# Altium PCB oxi_dev2.PcbDoc
Units mil, origin at the board's own origin, x right, y up, seen from the top; angles counter-clockwise.
Board outline 6000 x 4000 mil, 2 copper layers (Top Layer, Bottom Layer); 84 components, 70 nets, 346 pads, 0 vias.
Unrouted connection lines stored in the file: 231.
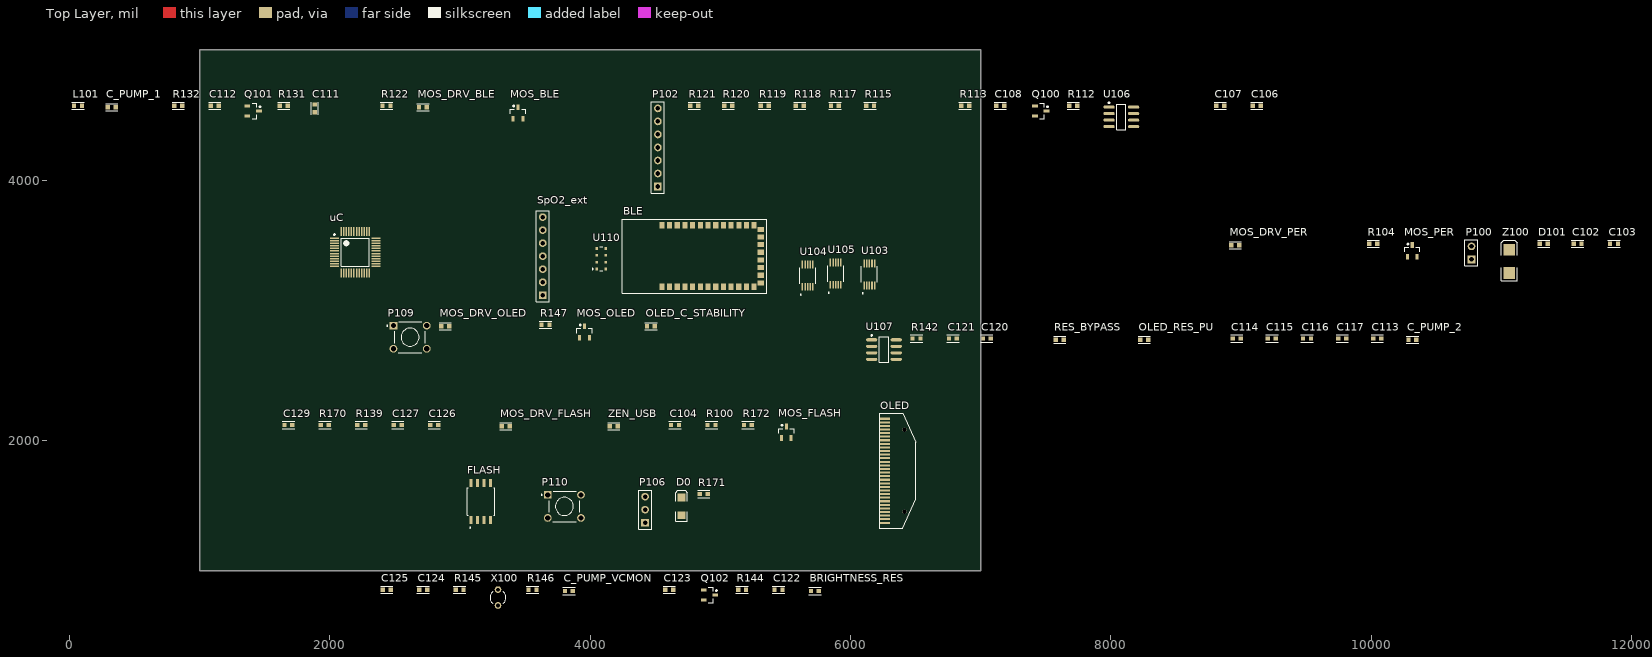
[diagram p0: Top Layer view]
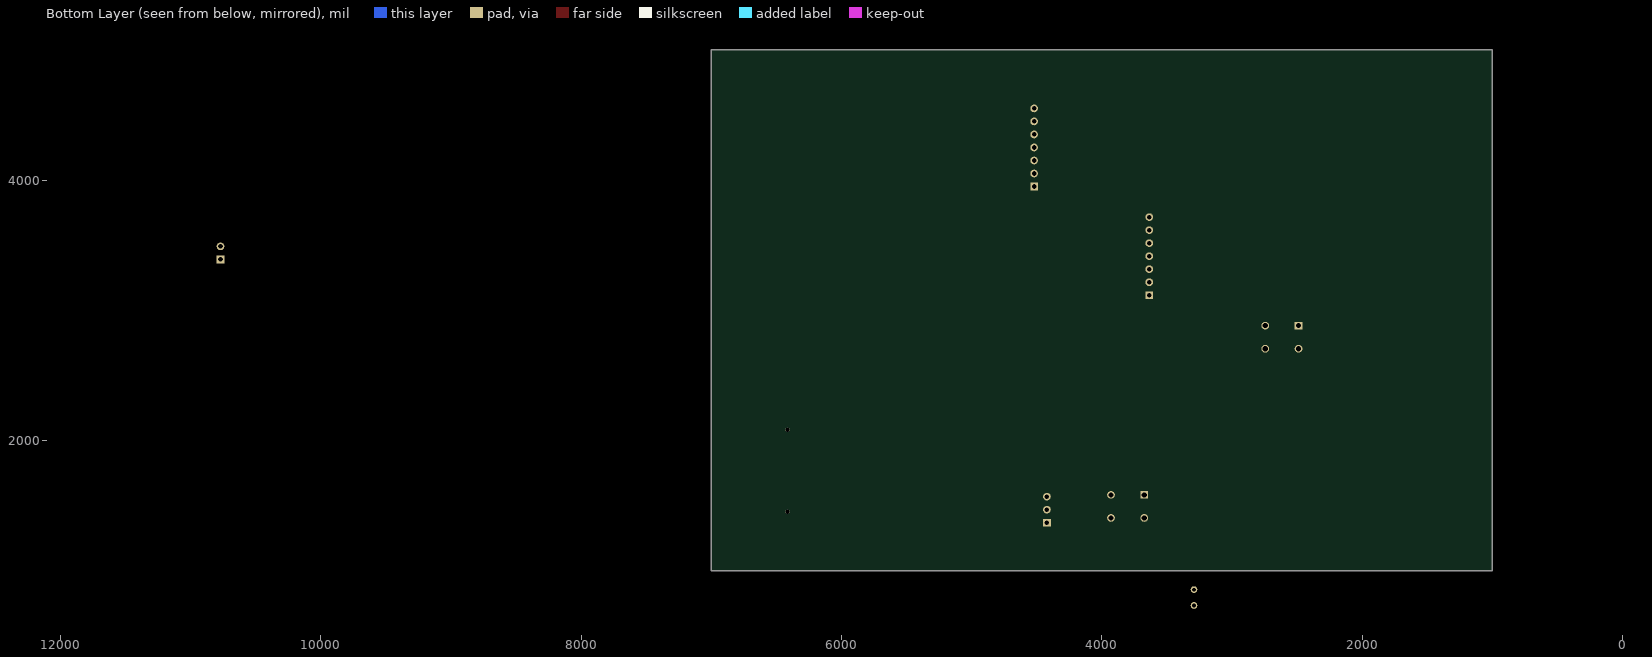
[diagram p1: Bottom Layer view, seen from below]

## Layer stack, top to bottom
Top Solder: solder mask 0.4, Solder Resist, Dk 3.5
Top Layer: signal copper 1.4
Dielectric 1: dielectric 12.6, FR-4, Dk 4.8
Bottom Layer: signal copper 1.4
Bottom Solder: solder mask 0.4, Solder Resist, Dk 3.5

## Board outline
1000,1000 7000,1000 7000,5000 1000,5000

## Design rules (kind name [scope] priority, off if disabled: settings)
Clearance [All] p1: gap=10 ignorepadtopadclearanceinfootprint=FALSE except(0: Arc-Hole Track-Hole SMDPad-Hole THPad-Hole Via-Hole Fill-Hole Poly-Hole Region-Hole Text-Hole; 5: Arc-Arc Arc-Track Arc-SMDPad Track-Track Track-SMDPad SMDPad-SMDPad)
PolygonConnect [All] p1: connectstyle=Relief reliefconductorwidth=10 reliefentries=4 polygonreliefangle="90 Angle" airgapwidth=10
RoutingVias [All] p1: holewidth=28 width=50 viastyle="Through Hole" minholewidth=28 minwidth=50 maxholewidth=28 maxwidth=50
SolderMaskExpansion [All] p1: expansion=4
Width [All] p1: maxlimit=10 minlimit=10 preferedwidth=10
30 further rules are at their usual default settings.

## Components (designator, comment, footprint, x,y, rotation, side; value= is the part's Value field where it differs from the comment)
BLE "HM-16" HM-16 4271.14,3160 r90 top
BRIGHTNESS_RES "Res3" SMD-0603-RES 5726.5,842.52 r90 top value=390k
C102 "47UF 16V(B)SMD" SMD-0603-RES 11585,3510 r90 top
C103 "100nF" SMD-0603-RES 11865,3510 r90 top
C104 "100nF" SMD-0603-RES 4651.5,2117.52 r90 top
C106 "100nF" SMD-0603-RES 9120,4570 r90 top
C107 "100nF" SMD-0603-RES 8840,4570 r90 top
C108 "100nF" SMD-0603-RES 7150,4570 r90 top
C111 "100nF" SMD-0603-RES 1885,4550 r0 top
C112 "100nF" SMD-0603-RES 1115,4570 r90 top
C113 "4.7uf" SMD-0603-RES 10046.5,2782.52 r90 top
C114 "100nF" SMD-0603-RES 8966.5,2782.52 r90 top
C115 "100nF" SMD-0603-RES 9236.5,2782.52 r90 top
C116 "100nF" SMD-0603-RES 9506.5,2782.52 r90 top
C117 "10nF" SMD-0603-RES 9776.5,2782.52 r90 top
C120 "100nF" SMD-0603-RES 7046.5,2782.52 r90 top
C121 "100nF" SMD-0603-RES 6786.5,2782.52 r90 top
C122 "20pF" SMD-0603-RES 5446.5,852.52 r90 top
C123 "100nF" SMD-0603-RES 4606.5,852.52 r90 top
C124 "100nF" SMD-0603-RES 2716.5,852.52 r90 top value=100pF
C125 "20pF" SMD-0603-RES 2436.5,852.52 r90 top
C126 "100nF" SMD-0603-RES 2801.5,2117.52 r90 top
C127 "1uF" SMD-0603-RES 2521.5,2117.52 r90 top
C129 "10pF" SMD-0603-RES 1681.5,2117.52 r90 top
C_PUMP_1 "Cap Semi" SMD-0603-RES 325,4560 r90 top value=1uF
C_PUMP_2 "Cap Semi" SMD-0603-RES 10316.5,2772.52 r90 top value=1uF
C_PUMP_VCMON "Cap Semi" SMD-0603-RES 3836.5,842.52 r90 top value=10uF
D0 "LED (0805) B" 3.2X1.6X1.1 4701.5,1492.52 r90 top
D101 "LED (0805) B" SMD-0603-RES 11325,3510 r90 top
FLASH "W25Q16BVSSIG" SOIC127P790X216-8N 3160,1530 r90 top
L101 "EBLS2012-101K" SMD-0603-RES 65,4570 r90 top
MOS_BLE "FDN360P" SOT23_N 3445,4515 r90 top
MOS_DRV_BLE "10K" SMD-0603-RES 2715,4560 r90 top value=1K
MOS_DRV_FLASH "10K" SMD-0603-RES 3351.5,2107.52 r90 top value=1K
MOS_DRV_OLED "10K" SMD-0603-RES 2886.5,2877.52 r90 top value=1K
MOS_DRV_PER "10K" SMD-0603-RES 8955,3500 r90 top value=1K
MOS_FLASH "FDN360P" SOT23_N 5506.5,2062.52 r90 top
MOS_OLED "FDN360P" SOT23_N 3956.5,2832.52 r90 top
MOS_PER "FDN360P" SOT23_N 10315,3455 r90 top
OLED "OLED" OLED0.96_NO3D 6265,1366.73 r90 top
OLED_C_STABILITY "Cap Semi" SMD-0603-RES 4466.5,2877.52 r90 top value=10uF
OLED_RES_PU "Res3" SMD-0603-RES 8256.5,2772.52 r90 top value=4.7k
P100 "Header 2" HDR1X2 10770,3390 r90 top
P102 "Header 7" HDR1X7 4520,3950 r90 top
P106 "Header 3" HDR1X3 4421.5,1367.52 r90 top
P109 "Header 2" PUSH_BTN 2611.5,2792.52 r0 top
P110 "Header 2" PUSH_BTN 3796.5,1492.52 r0 top
Q100 "2n7002" SOT23_N 7460,4530 r0 top
Q101 "2n7002" SOT23_N 1410,4530 r0 top
Q102 "2n7002" SOT23_N 4916.5,812.52 r0 top
R100 "100" SMD-0603-RES 4931.5,2117.52 r90 top value=1K
R104 "100" SMD-0603-RES 10015,3510 r90 top value=1K
R112 "1k" SMD-0603-RES 7710,4570 r90 top
R113 "100" SMD-0603-RES 6880,4570 r90 top value=1K
R115 "100" SMD-0603-RES 6150,4570 r90 top value=1K
R117 "100" SMD-0603-RES 5880,4570 r90 top value=1K
R118 "100" SMD-0603-RES 5610,4570 r90 top value=1K
R119 "100" SMD-0603-RES 5340,4570 r90 top value=1K
R120 "22" SMD-0603-RES 5060,4570 r90 top
R121 "10k" SMD-0603-RES 4800,4570 r90 top value=1K
R122 "22" SMD-0603-RES 2435,4570 r90 top value=1K
R131 "1k" SMD-0603-RES 1645,4570 r90 top
R132 "22" SMD-0603-RES 835,4570 r90 top
R139 "2.7k" SMD-0603-RES 2241.5,2117.52 r90 top
R142 "10K" SMD-0603-RES 6506.5,2782.52 r90 top value=1K
R144 "1k" SMD-0603-RES 5166.5,852.52 r90 top
R145 "10K" SMD-0603-RES 2996.5,852.52 r90 top value=1K
R146 "1meg" SMD-0603-RES 3556.5,852.52 r90 top value=1K
R147 "22" SMD-0603-RES 3656.5,2887.52 r90 top
R170 "100k" SMD-0603-RES 1961.5,2117.52 r90 top
R171 "22" SMD-0603-RES 4871.5,1587.52 r90 top
R172 "22" SMD-0603-RES 5211.5,2117.52 r90 top
RES_BYPASS "Cap Semi" SMD-0603-RES 7606.5,2772.52 r90 top value=10uF
SpO2_ext "Header 7" HDR1X7 3635,3115 r90 top
U103 "AD5683RBRMZ" SOP50P490X110-10N 6145,3275 r90 top
U104 "AD5683RBRMZ" SOP50P490X110-10N 5670,3265 r90 top
U105 "AD5683RBRMZ" SOP50P490X110-10N 5885,3280 r90 top
U106 "AD8572ARZ" SO-8_N 8080,4485 r0 top
U107 "AD8572ARZ" SO-8_N 6256.5,2697.52 r0 top
U110 "SFH_7050" XDCR_SFH_7050 4085,3395 r90 top
uC "STM32F103C8T6" LQFP48_N 2195,3445 r0 top
X100 "8MHz" R38 3291.5,792.52 r0 top
Z100 "SMBJ3.3A" smb 11060,3375 r90 top
ZEN_USB "5V" SMD-0603-RES 4181.5,2107.52 r90 top

## Footprints (in the part's own frame and the unit in brackets; to place one, negate y for a bottom-side part, rotate by r counter-clockwise, add the part's x,y. Pads: shape width x height; smd on the part's side, far side on the other; paste and mask are expansions set on the pad)
3.2X1.6X1.1 [mm] "SMT LED; 2 Flat Leads"
  rect 1.5x1.5 smd: 1(-1.75,0) 2(1.75,0)
  silkscreen extent -2.9,-1.15 3.2,1.15
HDR1X2 [mm] "Connector; Header; 2 Position"
  rect 1.5x1.5 hole 0.9: 1(0,0)
  round 1.5 hole 0.9: 2(2.54,0)
  silkscreen extent -1.27,-1.27 3.81,1.27
HDR1X3 [mm] "Connector; Header; 3 Position"
  rect 1.5x1.5 hole 0.9: 1(0,0)
  round 1.5 hole 0.9: 2(2.54,0) 3(5.08,0)
  silkscreen extent -1.27,-1.27 6.35,1.27
HDR1X7 [mm] "Connector; Header; 7 Position"
  rect 1.5x1.5 hole 0.9: 1(0,0)
  round 1.5 hole 0.9: 2(2.54,0) 3(5.08,0) 4(7.62,0) 5(10.16,0) 6(12.7,0) 7(15.24,0)
  silkscreen extent -1.27,-1.27 16.51,1.27
HM-16 [mm]
  rect 1.25x1 smd: 1(0.508,-7.1) 2(0.508,-8.6) 3(0.508,-10.1) 4(0.508,-11.6) 5(0.508,-13.1) 6(0.508,-14.6) 7(0.508,-16.1) 8(0.508,-17.6) 9(0.508,-19.1) 10(0.508,-20.6) 11(0.508,-22.1) 12(0.508,-23.6) 13(0.508,-25.1) 22(12.492,-25.1) 23(12.492,-23.6) 24(12.492,-22.11) 25(12.492,-20.6) 26(12.492,-19.1) 27(12.492,-17.6) 28(12.492,-16.1) 29(12.492,-14.6) 30(12.492,-13.1) 31(12.492,-11.6) 32(12.492,-10.1) 33(12.492,-8.6) 34(12.492,-7.1)
  rect 1x1.25 smd: 14(1.27,-26.416) 15(2.76,-26.416) 16(4.25,-26.416) 17(5.74,-26.416) 18(7.23,-26.416) 19(8.72,-26.416) 20(10.21,-26.416) 21(11.7,-26.416)
  silkscreen extent -0.76,-27.56 13.72,0.64
LQFP48_N [mm] "Thin QFP, 48-Leads, Body 7x7mm, Pitch 0.5mm, IPC Medium Density"
  oval 1.8x0.3 smd: 1(-4.05,2.75) 2(-4.05,2.25) 3(-4.05,1.75) 4(-4.05,1.25) 5(-4.05,0.75) 6(-4.05,0.25) 7(-4.05,-0.25) 8(-4.05,-0.75) 9(-4.05,-1.25) 10(-4.05,-1.75) 11(-4.05,-2.25) 12(-4.05,-2.75) 25(4.05,-2.75) 26(4.05,-2.25) 27(4.05,-1.75) 28(4.05,-1.25) 29(4.05,-0.75) 30(4.05,-0.25) 31(4.05,0.25) 32(4.05,0.75) 33(4.05,1.25) 34(4.05,1.75) 35(4.05,2.25) 36(4.05,2.75)
  oval 0.3x1.8 smd: 13(-2.75,-4.05) 14(-2.25,-4.05) 15(-1.75,-4.05) 16(-1.25,-4.05) 17(-0.75,-4.05) 18(-0.25,-4.05) 19(0.25,-4.05) 20(0.75,-4.05) 21(1.25,-4.05) 22(1.75,-4.05) 23(2.25,-4.05) 24(2.75,-4.05) 37(2.75,4.05) 38(2.25,4.05) 39(1.75,4.05) 40(1.25,4.05) 41(0.75,4.05) 42(0.25,4.05) 43(-0.25,4.05) 44(-0.75,4.05) 45(-1.25,4.05) 46(-1.75,4.05) 47(-2.25,4.05) 48(-2.75,4.05)
  silkscreen extent -4.17,-2.75 2.75,3.57, body extent -3.5,-3.5 3.5,3.5, height 1.6
OLED0.96_NO3D [mm]
  round 0.8 hole 0.8 unplated: 0(2.15,-3.79) 0(18.15,-3.79)
  rrect30% 0.4x2 smd: 1(0,0) 2(0.7,0) 3(1.4,0) 4(2.1,0) 5(2.8,0) 6(3.5,0) 7(4.2,0) 8(4.9,0) 9(5.6,0) 10(6.3,0) 11(7,0) 12(7.7,0) 13(8.4,0) 14(9.1,0) 15(9.8,0) 16(10.5,0) 17(11.2,0) 18(11.9,0) 19(12.6,0) 20(13.3,0) 21(14,0) 22(14.7,0) 23(15.4,0) 24(16.1,0) 25(16.8,0) 26(17.5,0) 27(18.2,0) 28(18.9,0) 29(19.6,0) 30(20.3,0)
  silkscreen extent -1.03,-6 21.33,1.14
PUSH_BTN [mm]
  rect 1.498x1.498 hole 0.99: 1(-3.123,2.25)
  round 1.498 hole 0.99: 2(3.377,2.25) 3(-3.123,-2.25) 4(3.377,-2.25)
  silkscreen extent -4.42,-3 3.13,3, body extent -3.73,-3 4.06,3, height 5.01
R38 [mm] "Crystal, Thru-Hole; 2 Leads; Body 3.1 x 8.2 mm (Dia.xH)"
  round 1.3 hole 0.7: 1(0,1.55) 2(0,-1.55)
  silkscreen extent -1.55,-1.19 1.55,1.17
smb [mm] "DO-214-AA/SMB; 2 C-Bend Leads; Body 5.3 x 3.6 mm, inc. leads (LxW)"
  rect 2.3x2.3 smd: 1(-2.25,0) 2(2.25,0)
  silkscreen extent -3.8,-1.55 4.1,1.55
SMD-0603-RES [mm]
  rect 0.85x0.85 smd: 1(0,0.775) 2(0,-0.775)
  silkscreen extent -0.7,-1.2 0.7,1.2, body extent -0.4,-0.85 0.4,0.85, height 0.56
SO-8_N [mm] "SOIC, 8-Leads, Body 4.9x3.9mm, Pitch 1.27mm, IPC Medium Density"
  oval 2.2x0.6 smd: 1(-2.4,1.905) 2(-2.4,0.635) 3(-2.4,-0.635) 4(-2.4,-1.905) 5(2.4,-1.905) 6(2.4,-0.635) 7(2.4,0.635) 8(2.4,1.905)
  silkscreen extent -2.52,-2.5 0.9,2.88, body extent -1.95,-2.45 1.95,2.45, height 1.75
SOIC127P790X216-8N [mm]
  rrect25% 1.61x0.58 smd: 1(-3.605,1.905) 2(-3.605,0.635) 3(-3.605,-0.635) 4(-3.605,-1.905) 5(3.605,-1.905) 6(3.605,-0.635) 7(3.605,0.635) 8(3.605,1.905)
  silkscreen extent -5.18,-2.69 2.69,2.69
SOP50P490X110-10N [mm]
  rrect25% 1.55x0.3 smd: 1(-2.155,1) 2(-2.155,0.5) 3(-2.155,0) 4(-2.155,-0.5) 5(-2.155,-1) 6(2.155,-1) 7(2.155,-0.5) 8(2.155,0) 9(2.155,0.5) 10(2.155,1)
  silkscreen extent -3.8,-1.55 1.55,1.55, body extent -2.45,-1.5 2.45,1.5, height 0.48
SOT23_N [mm] "SOT23, 3-Leads, Body 2.9x1.3mm, Pitch 0.95mm, Lead Span 2.3mm - Reverse Pinning, IPC Medium Density"
  rect 1.15x0.6 smd: 1(1.125,0) 2(-1.125,-0.95) 3(-1.125,0.95)
  silkscreen extent -0.2,-1.5 1.47,1.5, body extent -0.7,-1.5 0.7,1.5, height 1.1
XDCR_SFH_7050 [mm]
  rect 0.5x0.5 smd paste-1 mask+0: 1(-2,0.9) 2(-0.69,0.9) 3(0.69,0.9) 4(2,0.9) 5(2,-0.9) 6(0.69,-0.9) 7(-0.69,-0.9) 8(-2,-0.9)
  silkscreen extent -2.35,-0.33 2.35,1.8, body extent -2.4,-1.16 2.4,1.16, height 0.99

## Part data
BRIGHTNESS_RES OLED_RES_PU: "Resistor", LatestRevisionDate=29-May-2009, LatestRevisionNote="IPC-7351 Footprint Added.", PackageDescription="Chip Resistor", PackageReference=J1-0603, Published=8-Jun-2000, Publisher="Altium Limited"
C102: library part CAPACITOR, "TAJD106M035RNJ"
C103 C104 C106 C107 C108 C111 C112 C114 C115 C116 C117 C120 C121 C122 C123 C124 C125 C126 C127 C129: library part CAP, "Capacitor"
  C124: Published=8-Jun-2000, Publisher="Altium Limited", Revision="July-2002: Re-released for DXP Platform."
C113: library part CAPACITOR, "Capacitor", TAJA106M010RNJ=10UF/10V
C_PUMP_1 C_PUMP_2 C_PUMP_VCMON OLED_C_STABILITY RES_BYPASS: "Capacitor (Semiconductor SIM Model)", LatestRevisionDate=29-May-2009, LatestRevisionNote="IPC-7351 Footprint Added.", PackageDescription="Chip Capacitor", PackageReference=C1206, Published=8-Jun-2000, Publisher="Altium Limited"
D0 D101: library part LED3, "Typical BLUE SiC LED", PackageDocument=16-Apr-2002, DatasheetDocument=16-Apr-2002, LatestRevisionDate=17-Dec-2003, LatestRevisionNote="PCB Footprint replaced.", PackageReference=3.5X2.8X1.9, Published=8-Jun-2000, Publisher="Altium Limited"
FLASH: "FLASH - NOR Memory IC 16Mb _2M x 8_ SPI 104MHz 8-SOIC", Package="SOIC-8 Winbond", Availability=Unavailable, MF=Winbond, MP=W25Q16BVSSIG, Price=None, SnapEDA_Link=https://www.snapeda.com/parts/W25Q16BVSSIG/Winbond%20Electronics/view-part/512685/?ref=snap
L101: library part INDUCTOR, "Inductor 100UH (0805)", GLFR1608T100M-LR=10UH
MOS_BLE MOS_FLASH MOS_OLED MOS_PER: library part MOSFET-P, "P-Channel MOSFET", LatestRevisionDate=17-Jul-2002, LatestRevisionNote="Re-released for DXP Platform.", PackageDescription="TO, Flat Index; 3 In-Line, Axial Leads; Body Dia. 4.6mm; Lead Dia. 0.5 mm (max)", PackageReference=E3, PackageVersion=1995/1996, Published=8-Jun-2000, Publisher="Altium Limited"
MOS_DRV_BLE MOS_DRV_FLASH MOS_DRV_OLED MOS_DRV_PER R142: library part res1, "Resistor", Published=8-Jun-2000, Publisher="Altium Limited", Revision="July-2002: Re-released for DXP Platform."
OLED: library part OLED0.96
P100 P109 P110: "Header, 2-Pin", LatestRevisionDate=17-Jul-2002, LatestRevisionNote="Re-released for DXP Platform.", Publisher="Altium Limited"
P102 SpO2_ext: "Header, 7-Pin", LatestRevisionDate=17-Jul-2002, LatestRevisionNote="Re-released for DXP Platform.", Publisher="Altium Limited"
P106: "Header, 3-Pin", LatestRevisionDate=17-Jul-2002, LatestRevisionNote="Re-released for DXP Platform.", Publisher="Altium Limited"
Q100 Q101 Q102: library part MOSFET-N, "N-Channel MOSFET", LatestRevisionDate=17-Jul-2002, LatestRevisionNote="Re-released for DXP Platform.", PackageDescription="TO, Flat Index; 3 In-Line, Axial Leads; Body Dia. 4.6mm; Lead Dia. 0.5 mm (max)", PackageReference=E3, PackageVersion=1995/1996, Published=8-Jun-2000, Publisher="Altium Limited"
R100 R104 R113 R115 R117 R118 R119 R121 R122 R145 R146: library part Res1, "Resistor", Published=8-Jun-2000, Publisher="Altium Limited", Revision="July-2002: Re-released for DXP Platform."
R112 R120 R131 R132 R139 R144 R147 R170 R171 R172: library part RES1
U103 U104 U105: "Tiny 16-/14-/12-Bit SPI nanoDAC+, with  ±2 (16-Bit) LSB INL and 2 ppm/°C Reference"
U106 U107: library part NJM3404
U110: "Salida de voltaje del sensor de ox?­metro / frecuencia card?­aca", Package=None, Digi-Key_Part_Number=475-3346-1-ND, Digi-Key_Purchase_URL=https://www.digikey.com/product-detail/en/osram-opto-semiconductors-inc/SFH-7050/475-3346-1-ND/7645273?utm_source=snapeda&utm_medium=aggregator&utm_campaign=symbol, MF="OSRAM Opto", MP="SFH 7050", SnapEDA_Link=https://www.snapeda.com/parts/SFH%207050/OSRAM%20Opto%20Semiconductors%20Inc./view-part/227176/?ref=snap
uC: "STM32 ARM-based 32-bit MCU with 64 Kbytes Flash, 48-pin LQFP, Industrial Temperature"
X100: library part CRYSTAL, "NTK-8.000000-HC49US"
Z100: library part A_TVS, "400W SURFACE MOUNT TVS"
ZEN_USB: library part ZENER

## Nets (pads, with @x,y where several pads share a name; then routed paths per layer and width w, separated by ;. In a path a pad name is that pad's centre, name@x,y a point inside that pad or via, vN(x,y) a via of type N, cw(c..) or ccw(c..) an arc to the next point about the centre after c; other vN are vias at no path point)
BOOT0: R145.1 uC.44
BUILTIN_LED: D0.1 uC.17
CPU_R\E\S\E\T_Con\: P102.3 R119.1
CPU_RXD: P106.2 uC.13
CPU_TXD: P106.1 uC.12
CS_FLASH: FLASH.1 uC.25
DAC_Sync_1: U103.7 uC.45
DAC_Sync_2: U104.7 uC.46
DAC_Sync_3: U105.7 uC.21
JNTRST: R121.2 uC.40
JTDO: R117.2 uC.39
JTDO_Con: P102.5 R117.1
Key1: P109.1 uC.32
Key2: P110.1 uC.33
LEDA_1: C106.1 C107.1 C111.1 C120.1 C121.1 C126.1 MOS_PER.3 SpO2_ext.1 U103.1 U103.2 U103.9 U104.1 U104.2 U104.9 U105.1 U105.2 U105.9 U106.8 U107.8 U110.2 U110.3 U110.7
LEDK_1: Q100.3 U110.1
LEDK_2: Q101.3 U110.6
LEDK_3: Q102.3 U110.8
MISO: FLASH.2 uC.27
MOSI: FLASH.5 uC.28
NetBRIGHTNESS_RES_1: BRIGHTNESS_RES.1 OLED.26
NetC108_1: C108.1 R112.1 U106.1
NetC112_1: C112.1 R131.1 U106.7
NetC123_1: C123.1 R144.1 U107.1
NetC127_1: C127.1 C129.2 R170.2
NetC_PUMP_1_1: C_PUMP_1.1 OLED.3
NetC_PUMP_1_2: C_PUMP_1.2 OLED.2
NetC_PUMP_2_1: C_PUMP_2.1 OLED.5
NetC_PUMP_2_2: C_PUMP_2.2 OLED.4
NetC_PUMP_VCMON_1: C_PUMP_VCMON.1 OLED.27
NetD0_2: D0.2 R100.2
NetD101_2: D101.2 R104.2
NetP102_2: P102.2 R122.1
NetP109_2: P109.2 R171.1
NetP110_2: P110.2 R172.1
NetQ100_1: Q100.1 R112.2
NetQ101_1: Q101.1 R131.2
NetQ102_1: Q102.1 R144.2
NetU103_10: U103.10 U106.3
NetU104_10: U104.10 U106.5
NetU105_10: U105.10 U107.3
NRST: C124.2 R119.2 R142.1 uC.7
OLED_RES: OLED.14 OLED_RES_PU.1 RES_BYPASS.2 uC.19
OSC_In: C122.1 R146.1 uC.5 X100.2
OSC_Out: C125.1 R146.2 uC.6 X100.1
PLEDA: BLE.13 BLE.14 BLE.21 BLE.22 BRIGHTNESS_RES.2 C102.1 C103.2 C104.2 C106.2 C107.2 C111.2 C113.2 C114.2 C115.2 C116.2 C117.2 C120.2 C121.2 C122.2 C124.1 C125.2 C126.2 C_PUMP_VCMON.2 FLASH.4 OLED.1 OLED.8 OLED.10 OLED.12 OLED.13 OLED.15 OLED.16 OLED.17 OLED.21 OLED.22 OLED.23 OLED.24 OLED.25 OLED.29 OLED.30 OLED_C_STABILITY.2 P100.1 P102.1 P106.3 R100.1 R104.1 R120.2 R132.2 R139.1 R145.2 R147.2 R171.2 R172.2 RES_BYPASS.1 SpO2_ext.7 U103.4 U103.5 U104.4 U104.5 U105.4 U105.5 U106.4 U107.4 U107.5 U110.4 uC.8 uC.23 uC.35 uC.47 Z100.1 ZEN_USB.1
PLEDK: C129.1 R170.1 U107.6 U110.5
PWR_BLE: MOS_BLE.1 MOS_DRV_BLE.2 uC.22
PWR_OLED: MOS_DRV_FLASH.2 MOS_DRV_OLED.2 MOS_FLASH.1 MOS_OLED.1 uC.18
PWR_PER: MOS_DRV_PER.2 MOS_PER.1 uC.43
RX_BLE: BLE.1 uC.31
SCK: FLASH.6 uC.26 uC.42
SCL: OLED.18 SpO2_ext.2 U103.6 U104.6 U105.6
SDA: OLED.19 OLED.20 SpO2_ext.3 U103.8 U104.8 U105.8 uC.41
TCK: R115.2 uC.37
TCK_Con: P102.6 R115.1
TDI: R118.2 uC.38
TDI_Con: P102.4 R118.1
TMS: R113.2 uC.34
TMS_Con: P102.7 R113.1
TX_BLE: BLE.2 uC.30
VCC: C102.2 C103.1 D101.1 L101.1 MOS_BLE.2 MOS_DRV_BLE.1 MOS_DRV_FLASH.1 MOS_DRV_OLED.1 MOS_DRV_PER.1 MOS_FLASH.2 MOS_OLED.2 MOS_PER.2 P100.2 R122.2 R142.2 U103.3 U104.3 U105.3 Z100.2
VCC_BLT: BLE.12 MOS_BLE.3
VCC_FLASH: C104.1 FLASH.3 FLASH.7 FLASH.8 MOS_FLASH.3 ZEN_USB.2
VCC_OLED: MOS_OLED.3 OLED.6 OLED.9 OLED.28 OLED_C_STABILITY.1 OLED_RES_PU.2
VCPU: C113.1 C114.1 C115.1 C116.1 C117.1 L101.2 R121.1 uC.1 uC.9 uC.24 uC.36 uC.48
Vout_LED1: C108.2 Q100.2 R120.1 U106.2 uC.14
Vout_LED2: C112.2 Q101.2 R132.1 U106.6 uC.15
Vout_LED3: C123.2 Q102.2 R147.1 U107.2 uC.16
Vout_PLED: C127.2 R139.2 uC.10
pads on no net: BLE.3 BLE.4 BLE.5 BLE.6 BLE.7 BLE.8 BLE.9 BLE.10 BLE.11 BLE.15 BLE.16 BLE.17 BLE.18 BLE.19 BLE.20 BLE.23 BLE.24 BLE.25 BLE.26 BLE.27 BLE.28 BLE.29 BLE.30 BLE.31 BLE.32 BLE.33 BLE.34 OLED.0 OLED.7 OLED.11 P109.3 P109.4 P110.3 P110.4 SpO2_ext.4 SpO2_ext.5 SpO2_ext.6 U107.7 uC.2 uC.3 uC.4 uC.11 uC.20 uC.29